# Altium PCB Hydrophones_Array_MMCX_Adapter.PcbDoc
Units mil, origin at the board's own origin, x right, y up, seen from the top; angles counter-clockwise.
Board outline 675 x 480 mil, 2 copper layers (Top Layer, Bottom Layer); 5 components, 6 nets, 36 pads, 0 vias.
Unrouted connection lines stored in the file: 28.
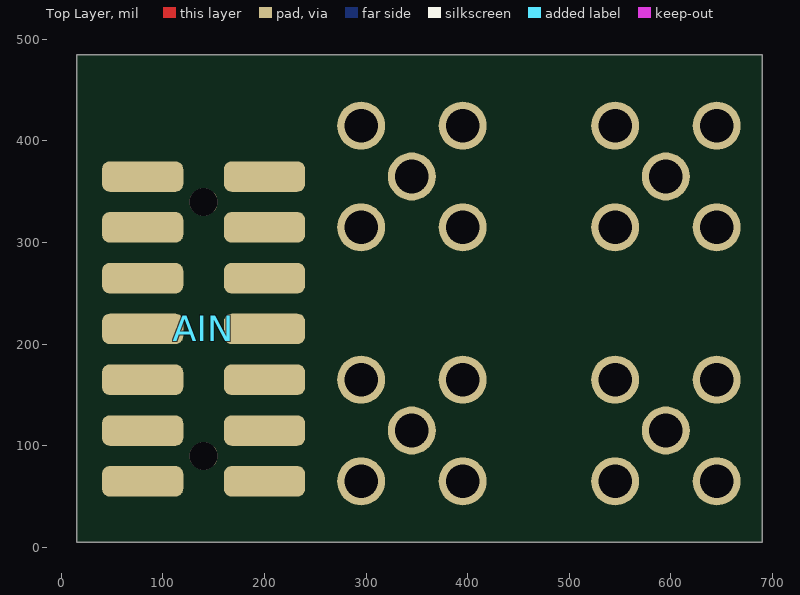
[diagram p0: Top Layer view]
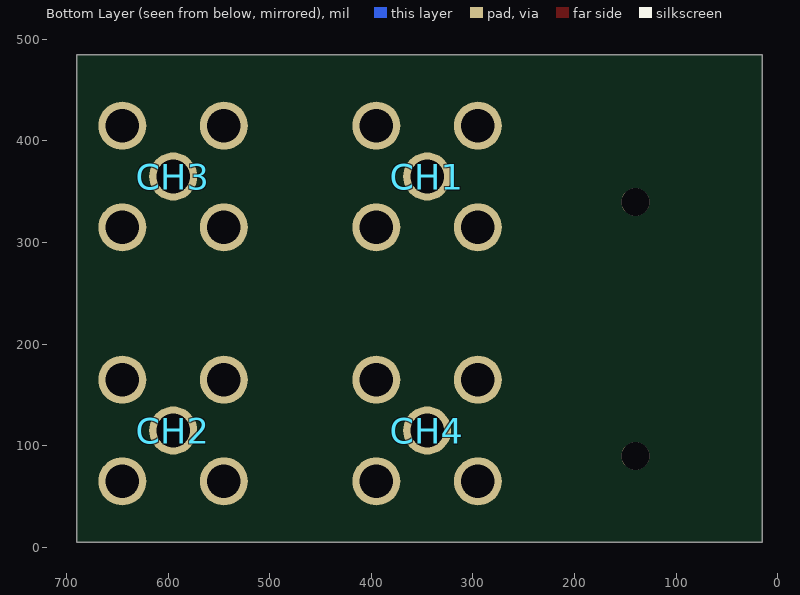
[diagram p1: Bottom Layer view, seen from below]

## Layer stack, top to bottom
Top Solder: solder mask 0.4, Solder Resist, Dk 3.5
Top Layer: signal copper 1.4
Dielectric 1: dielectric 12.6, FR-4, Dk 4.8
Bottom Layer: signal copper 1.4
Bottom Solder: solder mask 0.4, Solder Resist, Dk 3.5

## Board outline
15,5 15,485 690,485 690,5

## Design rules (kind name [scope] priority, off if disabled: settings)
Clearance [All] p1: gap=10 ignorepadtopadclearanceinfootprint=FALSE except(0: Arc-Hole Track-Hole SMDPad-Hole THPad-Hole Via-Hole Fill-Hole Poly-Hole Region-Hole Text-Hole)
PolygonConnect [All] p1: connectstyle=Relief reliefconductorwidth=10 reliefentries=4 polygonreliefangle="90 Angle" airgapwidth=10
RoutingVias [All] p1: holewidth=28 width=50 viastyle="Through Hole" minholewidth=28 minwidth=50 maxholewidth=28 maxwidth=50
SolderMaskExpansion [All] p1: expansion=4
Width [All] p1: maxlimit=10 minlimit=10 preferedwidth=10
30 further rules are at their usual default settings.

## Components (designator, comment, footprint, x,y, rotation, side; value= is the part's Value field where it differs from the comment)
AIN "Header 7X2" FLE-107-01-G-DV-A-TR 140,215 r90 top
CH1 "COAX-M" MMCX-J-P-H-ST-TH1 345,365 r180 bottom
CH2 "COAX-M" MMCX-J-P-H-ST-TH1 595,115 r180 bottom
CH3 "COAX-M" MMCX-J-P-H-ST-TH1 595,365 r180 bottom
CH4 "COAX-M" MMCX-J-P-H-ST-TH1 345,115 r180 bottom

## Footprints (in the part's own frame and the unit in brackets; to place one, negate y for a bottom-side part, rotate by r counter-clockwise, add the part's x,y. Pads: shape width x height; smd on the part's side, far side on the other; paste and mask are expansions set on the pad)
FLE-107-01-G-DV-A-TR [mil] "14 Position Receptacle Connector  Surface Mount"
  rrect50% 30x80 smd: 1(150,60) 2(150,-60) 3(100,60) 4(100,-60) 5(50,60) 6(50,-60) 7(0,60) 8(0,-60) 9(-50,60) 10(-50,-60) 11(-100,60) 12(-100,-60) 13(-150,60) 14(-150,-60)
  round 27.56 hole 27.56 unplated: ""(-125,0) ""(125,0)
  body extent -177,-90 177,90, height 178
MMCX-J-P-H-ST-TH1 [mm]
  round 1.2 hole 0.84: 1(0,0) 2(-1.27,-1.27) 3(1.27,-1.27) 4(1.27,1.27) 5(-1.27,1.27)
  body extent -1.75,-2.54 1.75,1.75, height 4.35

## Part data
AIN: "Header, 7-Pin, Dual row", LatestRevisionDate=17-Jul-2002, LatestRevisionNote="Re-released for DXP Platform.", Publisher="Altium Limited"
CH1 CH2 CH3 CH4: "RF Coaxial PCB Connector, MMCX; Thru-Hole, Vertical Mount Plug,  50 Ohm Impedance", PackageDocument="Rev. A, 16-Jun-1997", ComponentLink1Description="Manufacturer Link", ComponentLink1URL=http://www.amphenolrf.com/, DatasheetDocument=30-May-2003, DrillSize="Corresponds to nominal value.", LatestRevisionDate=15-Jul-2004, LatestRevisionNote="Component Replaced.", PackageReference=908-21103, PCB_Layout="Complies with manufacturer's recommendation.", Published=15-Jul-2004, Publisher="Altium Limited"

## Nets (pads, with @x,y where several pads share a name; then routed paths per layer and width w, separated by ;. In a path a pad name is that pad's centre, name@x,y a point inside that pad or via, vN(x,y) a via of type N, cw(c..) or ccw(c..) an arc to the next point about the centre after c; other vN are vias at no path point)
AGND: CH1.2 CH1.3 CH1.4 CH1.5 CH2.2 CH2.3 CH2.4 CH2.5 CH3.2 CH3.3 CH3.4 CH3.5 CH4.2 CH4.3 CH4.4 CH4.5
GND: AIN.1 AIN.2 AIN.3 AIN.5 AIN.7 AIN.9 AIN.11 AIN.12 AIN.13 AIN.14
IN1: AIN.4 CH1.1
IN2: AIN.6 CH3.1
IN3: AIN.8 CH2.1
IN4: AIN.10 CH4.1
pads on no net: AIN.

## Silkscreen, mask and mechanical layers (free items; w line width, h text height)
Mechanical 1:
  the board outline again, w10